# Altium PCB SiLPA_HE.PcbDoc (part 5 of 10)
Units mm, origin at the board's own origin, x right, y up, seen from the top; angles counter-clockwise.
Board outline 222.47 x 100.01 mm, 4 copper layers (Top Layer, Int1 (GND), Int2 (PWR), Bottom Layer), stack 1.508 mm thick; 661 components, 355 nets, 1925 pads, 1744 vias.
Unrouted connection lines stored in the file: 360.
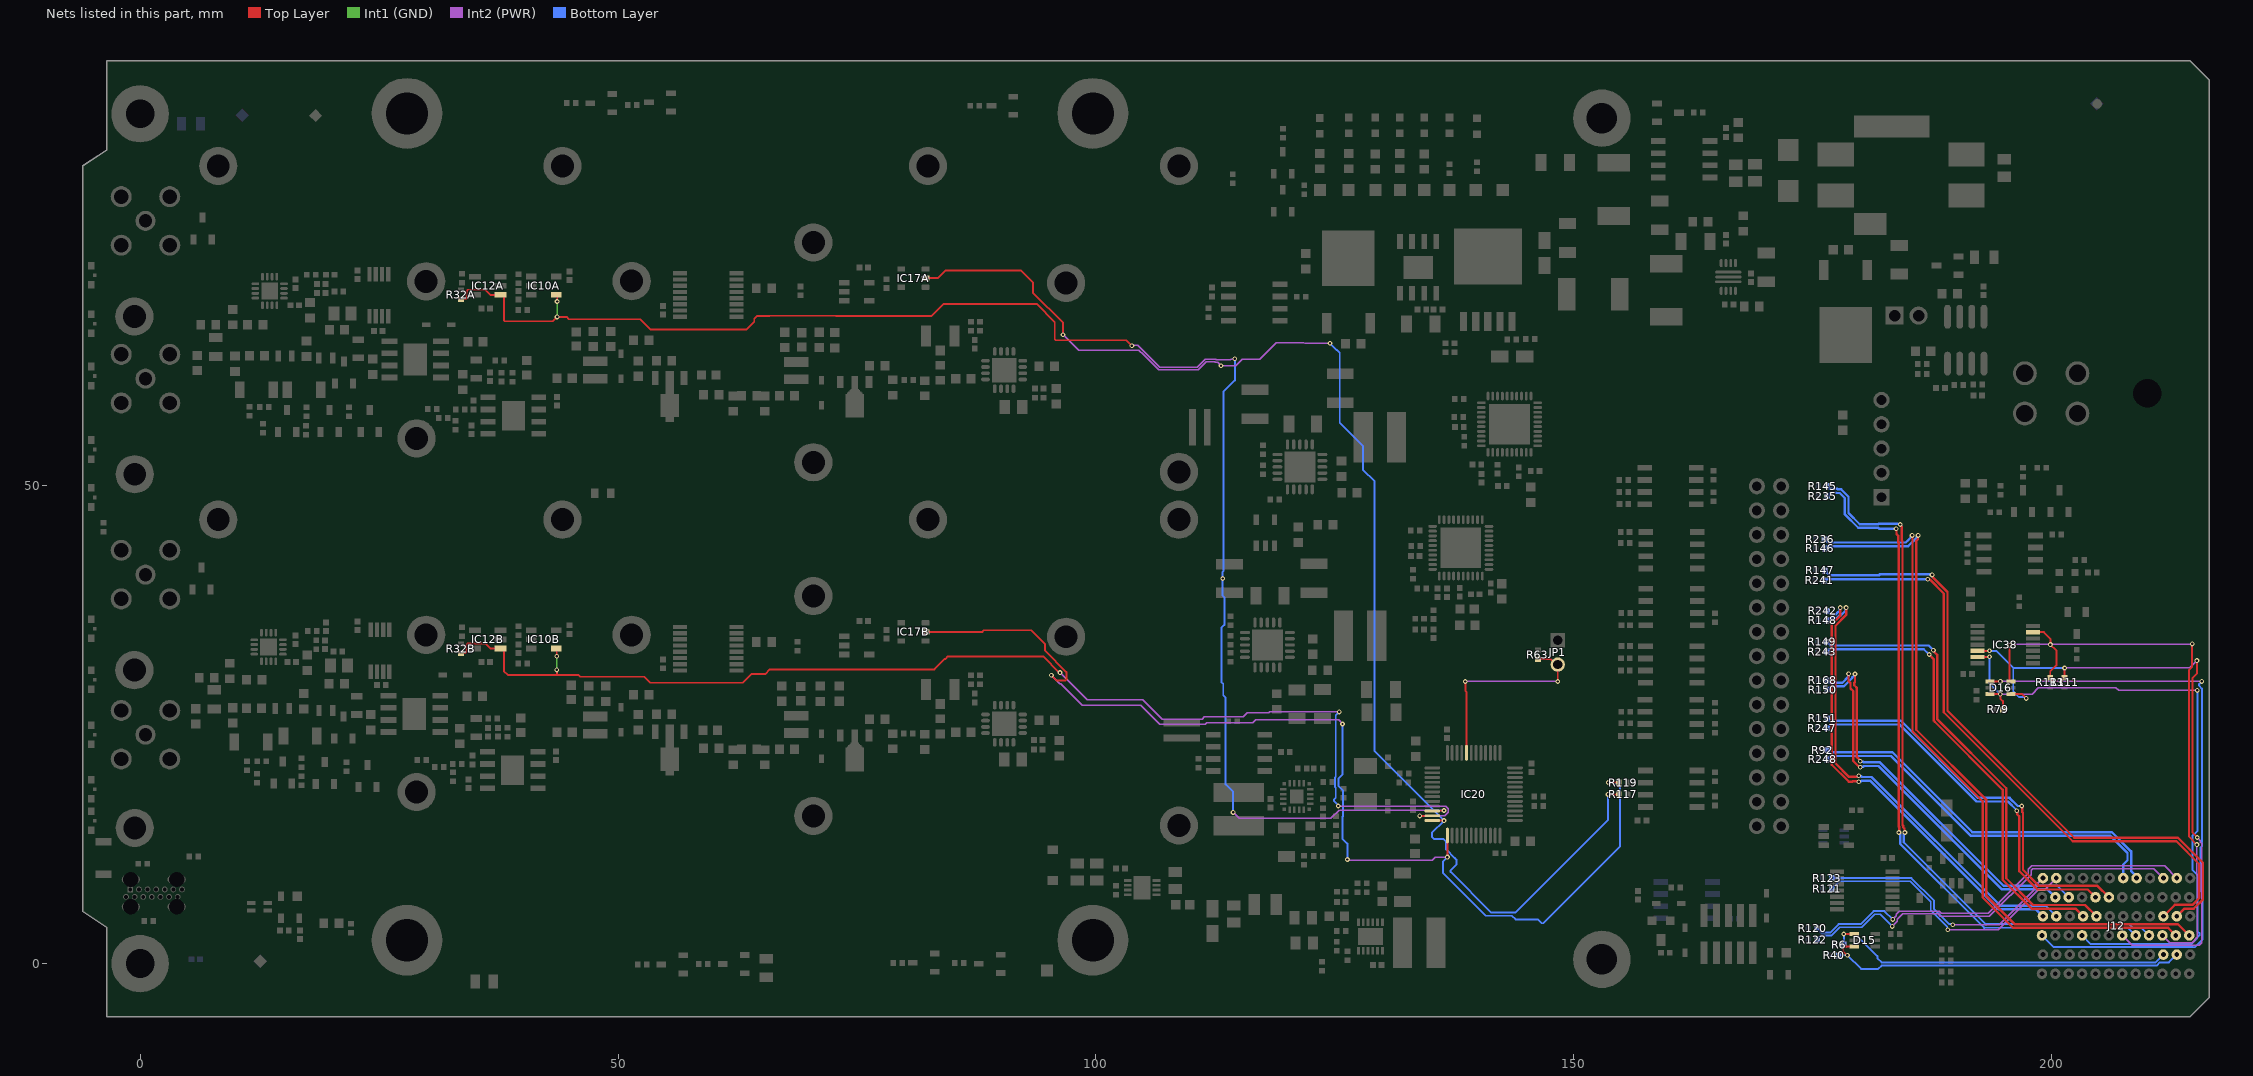
[diagram p5: the nets of this part, all layers, seen from the top]

## Part data (continued)
J3 J4 J5 J6: library part DELOCK_65848, "50 Ohm Through Hole SMA Right Angle PCB Jack", Manufacturer=DELOCK, Manufacturer Part Number="5848 (4043619658480)", Author=GK, Component Type=Standard, ComponentHeight=12.5, CreateDate=13.05.2019, Family=SMA, HelpURL=\\cern.ch\dfs\Applications\Altium\Datasheets\AMPHENOL_132203-16.pdf, LatestRevisionDate=13.05.2019, Mounted=Yes, Part Description="50 Ohm Through Hole SMA Right Angle PCB Jack", Part Number=DELOCK_65848, Pin Count=5, PressFit=No, Sense=No, SMD=No, Socket=No, Status=None
J7: library part MOLEX_39-30-0040, "Connector 4 Male", Manufacturer=MOLEX, Manufacturer Part Number=39-30-0040, Author="CERN DEM JLC", Component Type=Standard, ComponentHeight=11.4mm, CreateDate=2018-10-02, Family="Mini-Fit Jr.™", HelpURL=\\cern.ch\dfs\Applications\Altium\Datasheets\MOLEX_39-30-0040.pdf, LatestRevisionDate=2018-10-02, Mounted=Yes, Part Description="4.20mm (.165\") Pitch Mini-Fit Jr. Header, Dual Row, Right Angle with Snap-in Plastic Peg PCB Lock, 4 Circuits", Part Number=MOLEX_39-30-0040, Pin Count=4, PressFit=No, Sense=No, SMD=No, Socket=No, Status=None
J9: library part 3M_N2530-6002RB, "Connector 30 Male", Manufacturer=3M, Manufacturer Part Number=N2530-6002RB, Author="CERN DEM JLC", Component Type=Standard, ComponentHeight=10.03mm, CreateDate=11.02.2009, Family="Header 30", HelpURL=\\cern.ch\dfs\Applications\Altium\Datasheets\3M_N2530-6002RB.pdf, LatestRevisionDate=11.08.2009, Mounted=Yes, Part Description="30 Contacts - Straight .100'' x .100'' Low Profile Four-Wall Header, 2500 Series", Part Number=3M_N2530-6002RB, Pin Count=30, PressFit=No, Sense=No, SMD=No, Socket=No, Status=None
J10: library part "CON_2x10 1.27 SMT_male_HARWIN", "10 Contacts - Pitch 1.27mm - Dual Row SMT Vertical Pin Header (Post Lead = 3mm, Insulator 1mm)", Manufacturer=HARWIN, Manufacturer Part Number=M50-3600542, Part Number=HARWIN_M50-3600542, Author=GK, Component Type=Standard, ComponentHeight=5.13mm, CreateDate=15.03.2017, Family="Header 10", HelpURL=\\cern.ch\dfs\Applications\Altium\Datasheets\HARWIN_M50-3600842.pdf, LatestRevisionDate=22.05.2017, Mounted=Yes, Part Description="10 Contacts - Pitch 1.27mm - Dual Row SMT Vertical Pin Header (Post Lead = 3mm, Insulator 1mm)", Pin Count=10, PressFit=No, Sense=No, SMD=Yes, Socket=No, Status=None
J11: library part MOLEX_22-04-1021, "Connector 2 Male", Manufacturer=MOLEX, Manufacturer Part Number=22-04-1021, Author="CERN DEM JLC", Component Type=Standard, ComponentHeight=11.7mm, CreateDate=09.02.2012, Family=KK®, HelpURL=\\cern.ch\dfs\Applications\Altium\Datasheets\MOLEX_22-04-1021.pdf, LatestRevisionDate=09.02.2012, Mounted=Yes, Part Description="2.5mm (.100\") Pitch KK® Wire-to-Board Header, Vertical, with Friction Lock, 2 Circuits, Tin (Sn) Plating", Part Number=MOLEX_22-04-1021, Pin Count=2, PressFit=No, Sense=No, SMD=No, Socket=No, Status=None
J12: library part AMPHENOL_10052825-101LF, "72 Contacts Header, 6 Columns, 4 Pairs per Column", Manufacturer=AMPHENOL, Manufacturer Part Number=10052825-101LF, Author="CERN DEM MR", ClassName=Overlapping, Component Type=Standard, ComponentHeight=15.35mm, ComponentLink1Description=Application, ComponentLink1URL=\\cern.ch\dfs\Applications\Altium\Datasheets\AMPHENOL_10052825-101LF_Application.pdf, CreateDate=19/02/2018, Family="AirMax VS", HelpURL=\\cern.ch\dfs\Applications\Altium\Datasheets\AMPHENOL_10052825-101LF.pdf, LatestRevisionDate=19/02/2018, Mounted=Yes, Part Description="72 Contacts, 2mm Pitch, 6 Columns, 4 Pairs per Column, 4 Walls, Right Angle Header", Part Number=AMPHENOL_10052825-101LF, Pin Count=72, PressFit=Yes, Sense=No, SMD=No, Socket=No, Status=None
JP1: library part JUMPER, "Jumper", Supplier Part Number 1=1798942, Supplier 1=Farnell
L1A L1B L2A L2B: library part IND0603_MURATA_BLM18HE102SN1, Case=0603, Manufacturer=MURATA, Manufacturer Part Number=BLM18HE102SN1, Power=600mA, Resistance=0.35R, Tolerance=±25%, Author="CERN DEM JLC", Component Type=Standard, ComponentHeight=0.95mm, CreateDate=09.12.2013, HelpURL=\\cern.ch\dfs\Applications\Altium\Datasheets\IND0603_MURATA_BLM18H.pdf, LatestRevisionDate=25.10.2018, Mounted=Yes, Part Description="SMD EMIFIL Suppression Chip Ferrite Bead", Part Number=IND0603_MURATA_BLM18HE102SN1, Pin Count=2, Sense=No, SMD=Yes, Socket=No, Status=None
L3A L3B L4A L4B: library part IND_1UH_2%_ABRACON_AISC-1008, "Inductor", Case=1008, Manufacturer=ABRACON, Manufacturer Part Number=AISC-1008-1R0G, Power=370mA, Resistance=1.8R, Tolerance=±2%, Author="CERN DEM BC", Component Type=Standard, ComponentHeight=2.29mm, CreateDate=26.08.2019, HelpURL=\\cern.ch\dfs\Applications\Altium\Datasheets\IND_ABRACON_AISC-1008.pdf, LatestRevisionDate=26.08.2019, Mounted=Yes, Part Description="SMD Ceramic Wire-Wound Chip Inductor", Part Number=IND_1UH_2%_ABRACON_AISC-1008, Pin Count=2, Sense=No, SMD=Yes, Socket=No, Status=None
L5A L5B: library part IND0603_TDK_MPZ1608R391A, "Inductor", Case=0603, Manufacturer=TDK, Manufacturer Part Number=MPZ1608R391A, Power=1.2A, Resistance=0.12R, Tolerance=±25%, Author="CERN DEM JLC", Component Type=Standard, ComponentHeight=0.95mm, CreateDate=2009-12-02, HelpURL=\\cern.ch\dfs\Applications\Altium\Datasheets\IND0603_TDK_MPZ1608.pdf, LatestRevisionDate=2009-12-02, Mounted=Yes, Part Description="SMT Chip Bead for Power Line", Part Number=IND0603_TDK_MPZ1608R391A, Pin Count=2, Sense=No, SMD=Yes, Socket=No, Status=None
L8 L9 L10: library part IND_1.5UH_20%_TDK_SPM6530, "Inductor With Core", Manufacturer=TDK, Manufacturer Part Number=SPM6530T-1R5M100, Power=11A, Resistance=0.0097R, Tolerance=±20%, Author="CERN DEM MR", Component Type=Standard, ComponentHeight=3mm, CreateDate=08.11.2016, HelpURL=\\cern.ch\dfs\Applications\Altium\Datasheets\IND_TDK_SPM6530.pdf, LatestRevisionDate=08.11.2016, Mounted=Yes, Part Description="SMD Inductor for Power Circuits (Wound Metal), SPM Series", Part Number=IND_1.5UH_20%_TDK_SPM6530, Pin Count=2, Sense=No, SMD=Yes, Socket=No, Status=None
L11 L21 L22: library part IND_4.7UH_20%_WURTH_WE-SPC_74408943047, "Inductor With Core", Manufacturer="WURTH ELEKTRONIK", Manufacturer Part Number=74408943047, Power=2.2A, Resistance=0.045R, Tolerance=±20%, Author="CERN DEM JLC", Component Type=Standard, ComponentHeight=4.1mm, CreateDate=24.11.2014, HelpURL=\\cern.ch\dfs\Applications\Altium\Datasheets\IND_WURTH_WE-SPC_74408943047.pdf, LatestRevisionDate=05.07.2017, Mounted=Yes, Part Description="SMD Shielded Power Inductor (WE-SPC Series)", Part Number=IND_4.7UH_20%_WURTH_WE-SPC_74408943047, Pin Count=2, Sense=No, SMD=Yes, Socket=No, Status=None
L12A L12B L13A L13B: library part IND0805_TDK_ADL2012S-1R2M-T01, "Inductor", Case=0805, Manufacturer=TDK, Manufacturer Part Number=ADL2012S-1R2M-T01, Power=400mA, Resistance=0.5Ohm, Tolerance=±20%, Author=GK, Component Type=Standard, ComponentHeight=1.45mm, CreateDate=24.03.2020, HelpURL=\\cern.ch\dfs\Applications\Altium\Datasheets\IND0805_TDK_MLZ2012P220WT000.pdf, LatestRevisionDate=24.03.2020, Mounted=Yes, Part Description="SMD Wirewound", Part Number=IND0805_TDK_ADL2012S-1R2M-T01, Pin Count=2, Sense=No, SMD=Yes, Socket=No
L15A L15B: library part IND0603_4.7NH_2%_MURATA_LQW18AN4N7G8Z, "Inductor With Core", Case=0603, Manufacturer=MURATA, Manufacturer Part Number=LQW18AN4N7G8Z, Power=1.5A, Resistance=0R054, Tolerance=±2%, Author="CERN DEM BC", Component Type=Standard, ComponentHeight=1mm, CreateDate=26.08.2019, HelpURL=\\cern.ch\dfs\Applications\Altium\Datasheets\IND_MURATA_LQW18AN4N7G8Z.pdf, LatestRevisionDate=26.08.2019, Mounted=Yes, Part Description="Wirw Wond RF Inductor For Automotive", Part Number=IND0603_4.7NH_2%_MURATA_LQW18AN4N7G8Z, Pin Count=2, Sense=No, SMD=Yes, Socket=No, Status=None
L16A L16B: library part IND0603_6.8NH_2%_MURATA_LQW18AN6N8G8Z, "Inductor With Core", Case=0603, Manufacturer=MURATA, Manufacturer Part Number=LQW18AN6N8G8Z, Power=1.9A, Resistance=0R04, Tolerance=±2%, Author="CERN DEM BC", Component Type=Standard, ComponentHeight=1mm, CreateDate=26.08.2019, HelpURL=\\cern.ch\dfs\Applications\Altium\Datasheets\IND_MURATA_LQW18AN6N8G8Z.pdf, LatestRevisionDate=26.08.2019, Mounted=Yes, Part Description="Wirw Wond RF Inductor For Automotive", Part Number=IND0603_6.8NH_2%_MURATA_LQW18AN6N8G8Z, Pin Count=2, Sense=No, SMD=Yes, Socket=No, Status=None
L17: library part IND1008_1UH_20%_WURTH_74479787210B, "Inductor", Case=1008, Manufacturer="WURTH ELEKTRONIK", Manufacturer Part Number=74479787210B, Power=1.95A, Resistance=0.06R, Tolerance=±20%, Author="CERN DEM JLC", Component Type=Standard, ComponentHeight=1mm, CreateDate=01.10.2014, HelpURL=\\cern.ch\dfs\Applications\Altium\Datasheets\IND_WURTH_WE-PMI_74479787210B.pdf, LatestRevisionDate=01.10.2014, Mounted=Yes, Part Description="Power Multilayer Inductor (WE-PMI Series)", Part Number=IND1008_1UH_20%_WURTH_74479787210B, Pin Count=2, Sense=No, SMD=Yes, Socket=No, Status=None
L18: library part IND0603_MURATA_BLM18SG121TN1D, "Inductor", Case=0603, Manufacturer=MURATA, Manufacturer Part Number=BLM18SG121TN1D, Power=3A, Resistance=0.025R, Tolerance=±25%, Author="CERN DEM JLC", Component Type=Standard, ComponentHeight=0.65mm, CreateDate=23.07.2014, HelpURL=\\cern.ch\dfs\Applications\Altium\Datasheets\IND0603_MURATA_BLM18S.pdf, LatestRevisionDate=23.07.2014, Mounted=Yes, Part Description="SMD EMIFIL Suppression Chip Ferrite Bead", Part Number=IND0603_MURATA_BLM18SG121TN1D, Pin Count=2, Sense=No, SMD=Yes, Socket=No, Status=None
L19: library part IND_MURATA_DLW21SN900SQ2L, "Inductor Common Mode", Case=0805, Manufacturer=MURATA, Manufacturer Part Number=DLW21SN900SQ2L, Power=330mA, Resistance=0.35R, Tolerance=±25%, Author="CERN DEM JLC", Component Type=Standard, ComponentHeight=1.4mm, CreateDate=01.07.2014, HelpURL=\\cern.ch\dfs\Applications\Altium\Datasheets\IND_MURATA_DLW21S.pdf, LatestRevisionDate=01.07.2014, Mounted=Yes, Part Description="Wire Wound Common Mode Choke Coil (DLW21S Series)", Part Number=IND_MURATA_DLW21SN900SQ2L, Pin Count=4, Sense=No, SMD=Yes, Socket=No, Status=None
L20: library part IND_10UH_20%_WURTH_WE-SPC_74408943100, "Inductor With Core", Manufacturer="WURTH ELEKTRONIK", Manufacturer Part Number=74408943100, Power=1.65A, Resistance=0.082R, Tolerance=±20%, Author="CERN DEM MR", Component Type=Standard, ComponentHeight=4.1mm, CreateDate=30.06.2017, HelpURL=\\cern.ch\dfs\Applications\Altium\Datasheets\IND_WURTH_WE-SPC_74408943100.pdf, LatestRevisionDate=05.07.2017, Mounted=Yes, Part Description="SMD Shielded Power Inductor (WE-SPC Series)", Part Number=IND_10UH_20%_WURTH_WE-SPC_74408943100, Pin Count=2, Sense=No, SMD=Yes, Socket=No, Status=None
LD1 LD8 LD10: library part LED_AVAGO_HSMC-C120, "LED Red 1C 2A", Color=Red, Manufacturer="AVAGO TECHNOLOGIES", Manufacturer Part Number=HSMC-C120, Author="CERN DEM JMW", Bonding=No, Component Type=Standard, ComponentHeight=0.7mm, ComponentLink1Description="Design Guide", ComponentLink1URL=\\cern.ch\dfs\Applications\Altium\Datasheets\LED_AVAGO_HSMC-C120_DESIGN-GUIDE.pdf, CreateDate=22.07.2009, HelpURL=\\cern.ch\dfs\Applications\Altium\Datasheets\LED_AVAGO_HSMC-C120.pdf, LatestRevisionDate=20.06.2012, Mounted=Yes, PackageDescription="Red Chip LED, 2-Leads, Body 1.7x1.1mm, Side Emitting Package", Part Description="High Performance Right Angle Chip Red LED", Part Number=LED_AVAGO_HSMC-C120, Pin Count=2, PressFit=No, Sense=No, SMD=Yes, Socket=No
LD2: library part LED_AVAGO_HSME-C120, "LED Green 1C 2A", Manufacturer="AVAGO TECHNOLOGIES", Manufacturer Part Number=HSME-C120, Author="CERN DEM JMW", Bonding=No, Color=Green, Component Type=Standard, ComponentHeight=0.7mm, ComponentLink1Description="Design Guide", ComponentLink1URL=\\cern.ch\dfs\Applications\Altium\Datasheets\LED_AVAGO_HSME-C110_DESIGN-GUIDE.pdf, CreateDate=22.07.2009, HelpURL=\\cern.ch\dfs\Applications\Altium\Datasheets\LED_AVAGO_HSME-C120.pdf, LatestRevisionDate=20.06.2012, Mounted=Yes, PackageDescription="Green Chip LED, 2-Leads, Body 1.7x1.1mm, Side Emitting Package", Part Description="High Performance Right Angle Chip Green LED", Part Number=LED_AVAGO_HSME-C120, Pin Count=2, PressFit=No, Sense=No, SMD=Yes, Socket=No
LD3 LD4 LD5 LD6 LD7 LD9: library part LED_AVAGO_HSME-C120, "LED Green 1C 2A", Color=Green, Manufacturer="AVAGO TECHNOLOGIES", Manufacturer Part Number=HSME-C120, Author="CERN DEM JMW", Bonding=No, Component Type=Standard, ComponentHeight=0.7mm, ComponentLink1Description="Design Guide", ComponentLink1URL=\\cern.ch\dfs\Applications\Altium\Datasheets\LED_AVAGO_HSME-C110_DESIGN-GUIDE.pdf, CreateDate=22.07.2009, HelpURL=\\cern.ch\dfs\Applications\Altium\Datasheets\LED_AVAGO_HSME-C120.pdf, LatestRevisionDate=20.06.2012, Mounted=Yes, PackageDescription="Green Chip LED, 2-Leads, Body 1.7x1.1mm, Side Emitting Package", Part Description="High Performance Right Angle Chip Green LED", Part Number=LED_AVAGO_HSME-C120, Pin Count=2, PressFit=No, Sense=No, SMD=Yes, Socket=No
LD11 LD12 LD13 LD14 LD15 LD16 LD18: library part LED_0603_Green, "Green 0603", Manufacturer=KINGBRIGHT, Manufacturer Part Number=KPH-1608CGCK, Part Number=LED_KINGBRIGHT_KPH-1608CGCK, Author="CERN DEM JLC", Bonding=No, Color=Green, Component Type=Standard, ComponentHeight=0.65mm, CreateDate=03.07.2017, HelpURL=\\cern.ch\dfs\Applications\Altium\Datasheets\LED_KINGBRIGHT_KPH-1608CGCK.pdf, LatestRevisionDate=03.07.2017, Mounted=Yes, PackageDescription="SMT Green LED, Case 0603, Body L 1.6 x W 0.8mm H 0.65mm", Part Description="SMD Green LED, Case 1.6mmX0.8mm(0603), 0.65mm Thickness", Pin Count=2, PressFit=No, Sense=No, SMD=Yes, Socket=No
M1 M4: library part PLATED_HOLE3.0_PAD6.0, "Single Terminal Socket", Author="CERN DEM JLC", Component Type="Standard (No BOM)", ComponentHeight=0mm, CreateDate=26.05.2008, Family="Plated Hole", LatestRevisionDate=26.05.2008, Mounted=No, PackageDescription="Plated Through Hole: Hole Dia.=3.0mm Pad Dia.=6.0mm", Part Description="Plated Through Hole: Hole Dia.=3.0mm Pad Dia.=6.0mm", Part Number=PLATED_HOLE3.0_PAD6.0, Pin Count=1, SMD=No, Socket=No, Status=None, Table=Pads
Q1: library part XTAL_8MHZ_TXC_7A-8.000MAAE-T, "Quartz Crystal", Manufacturer="TXC CORPORATION", Manufacturer Part Number=7A-8.000MAAE-T, Author="CERN DEM JLC", Bonding=No, Component Type=Standard, ComponentHeight=1.2mm, CreateDate=09.10.2014, HelpURL=\\cern.ch\dfs\Applications\Altium\Datasheets\XTAL_TXC_7A.pdf, LatestRevisionDate=12.11.2014, Mounted=Yes, PackageDescription="2 Pins, 3.2x5mm, SMD Glass Seam Sealing Crystal, 7A Serie", Part Description="Tolerance: ±30ppm, Stability: ±30ppm, -20°C to +70°C, 12pF, SMD Glass Seam Sealing Crystal, 7A Series", Part Number=XTAL_8MHZ_TXC_7A-8.000MAAE-T, Pin Count=2, PressFit=No, Sense=No, SMD=Yes, Socket=No
R1A R1B R2A R2B R16 R26 R34 R35 R36 R37 R38 R39 R42 R43 R44 R45 R46 R47 R117 R118 R119: library part R0402_100R_1%_0.0625W_100PPM, "Resistor - 1%", Case=0402, Manufacturer=GENERIC, Manufacturer1 ComponentHeight=0.4mm, Manufacturer1 Example="YAGEO PHYCOMP", Manufacturer1 Part Number=232270671001L, Power=0.0625W, Tolerance=±1%, Author="CERN DEM JLC", Component Type=Standard, CreateDate=03.12.2007, HelpURL=\\cern.ch\dfs\Applications\Altium\Datasheets\R0402_Phycomp_RC0402.pdf, LatestRevisionDate=17.10.2012, Manufacturer Part Number=R0402_100R_1%_0.0625W_100PPM, Mounted=Yes, Part Description="General Purpose Thick Film Chip Resistor", Part Number=R0402_100R_1%_0.0625W_100PPM, Pin Count=2, PressFit=No, Sense=No, SMD=Yes, Socket=No, Status="Not Recommended", TC=±100ppm/°C
R3A R3B R108 R109 R110: library part R0603_1K_1%_0.1W_100PPM, "Resistor - 1%", Case=0603, Manufacturer=GENERIC, Manufacturer1 ComponentHeight=0.55mm, Manufacturer1 Example="NIC COMPONENT", Manufacturer1 Part Number=NRC06F1001TRF, Power=0.1W, Tolerance=±1%, Author="CERN DEM JLC", Component Type=Standard, CreateDate=03.12.2007, HelpURL=\\cern.ch\dfs\Applications\Altium\Datasheets\R0603_NIC_NRC.pdf, LatestRevisionDate=13.03.2008, Manufacturer Part Number=R0603_1K_1%_0.1W_100PPM, Mounted=Yes, Part Description="General Purpose Thick Film Chip Resistor", Part Number=R0603_1K_1%_0.1W_100PPM, Pin Count=2, PressFit=No, Sense=No, SMD=Yes, Socket=No, Status=Preferred, TC=±100ppm/°C
R4A R4B: library part R0603_NO-VALUE, "Resistor", Case=0603, Author="CERN DEM JLC", Component Type=Standard, CreateDate=03.12.2007, HelpURL=Undefined, LatestRevisionDate=13.03.2008, Manufacturer=Undefined, Manufacturer1 ComponentHeight=Undefined, Manufacturer1 Example=Undefined, Manufacturer1 Part Number=Undefined, Manufacturer Part Number=R0603_NO-VALUE, Mounted=No, Part Description="Reserved Footprint For a 0603 (1608) Chip Resistor", Part Number=R0603_NO-VALUE, Pin Count=2, PressFit=No, Sense=No, SMD=Yes, Socket=No, Status=None
R5A R5B: library part R0603_37R4_0.1%_0.063W_10PPM, "Resistor - 0.1%", Case=0603, Manufacturer=GENERIC, Manufacturer1 ComponentHeight=0.5mm, Manufacturer1 Example="TYCO HOLSWORTHY", Manufacturer1 Part Number=RN73C1J37R4BTDF, Power=0.063W, Tolerance=±0.1%, Author="CERN DEM JLC", Component Type=Standard, CreateDate=03.12.2007, HelpURL=\\cern.ch\dfs\Applications\Altium\Datasheets\R0603_Tyco_RN73.pdf, LatestRevisionDate=13.03.2008, Manufacturer Part Number=R0603_37R4_0.1%_0.063W_10PPM, Mounted=Yes, Part Description="Thin Film Chip Resistor", Part Number=R0603_37R4_0.1%_0.063W_10PPM, Pin Count=2, PressFit=No, Sense=No, SMD=Yes, Socket=No, Status="Not Recommended", TC=±10ppm
R6 R18A R18B R24A R24B R40 R41 R48 R49 R50 R85 R86 R87 R88 R92 R96 R97 R98 R99 R101A R101B R102 R103 R104 R105 R114 R120 R121 R122 R123 R127A R127B R128 R145 R146 R147 R148 R149 R150 R151 R159 R160 R161 R165A R165B R168 R174 R176 R180 R181 R197 R235 R236 R241 R242 R243 R247 R248: library part R0402_0R_JUMPER, "Resistor", Case=0402, Manufacturer=GENERIC, Manufacturer1 ComponentHeight=0.4mm, Manufacturer1 Example="YAGEO PHYCOMP", Manufacturer1 Part Number=232270591001L, Author="CERN DEM JLC", Component Type=Standard, CreateDate=03.12.2007, HelpURL=\\cern.ch\dfs\Applications\Altium\Datasheets\R0402_Phycomp_RC0402.pdf, LatestRevisionDate=17.10.2012, Manufacturer Part Number=R0402_0R_JUMPER, Mounted=Yes, Part Description="1A (0.05R Max DC Resistance) Zero Ohm Jumper", Part Number=R0402_0R_JUMPER, Pin Count=2, Sense=No, SMD=Yes, Socket=No
  R6 R18A R18B R24A R24B R40 R41 R48 R49 R50 R85 R86 R87 R88 R92 R96 R97 R98 R99 R101A R101B R103 R105 R114 R120 R121 R122 R123 R127A R127B R145 R146 R147 R148 R149 R150 R151 R159 R160 R161 R165A R165B R168 R174 R176 R180 R181 R197 R235 R236 R241 R242 R243 R247 R248: PressFit=No, Status="Not Recommended"
  R102 R104 R128: Status="Not recommended"
R7A R7B R8A R8B R25A R25B R137 R153 R171 R172: library part R0603_0R_JUMPER, "Resistor", Case=0603, Manufacturer=GENERIC, Manufacturer1 ComponentHeight=0.55mm, Manufacturer1 Example="NIC COMPONENT", Manufacturer1 Part Number=NRC06Z0, Author="CERN DEM JLC", Component Type=Standard, HelpURL=\\cern.ch\dfs\Applications\Altium\Datasheets\R0603_NIC_NRC.pdf, Manufacturer Part Number=R0603_0R_JUMPER, Mounted=Yes, Part Description="1A (0.05R Max DC Resistance) Zero Ohm Jumper", Part Number=R0603_0R_JUMPER, Pin Count=2, PressFit=No, Sense=No, SMD=Yes, Socket=No, Status=Preferred
  R7A R7B R8A R8B R137 R153 R171 R172: CreateDate=03.12.2007, LatestRevisionDate=13.03.2008
  R25A R25B: CreateDate=03/12/2007, LatestRevisionDate=13/03/2008
R9A R9B R10A R10B: library part R0603_150R_1%_0.1W_100PPM, "Resistor - 1%", Case=0603, Manufacturer=GENERIC, Manufacturer1 ComponentHeight=0.55mm, Manufacturer1 Example="NIC COMPONENT", Manufacturer1 Part Number=NRC06F1500TRF, Power=0.1W, Tolerance=±1%, Author="CERN DEM JLC", Component Type=Standard, CreateDate=03.12.2007, HelpURL=\\cern.ch\dfs\Applications\Altium\Datasheets\R0603_NIC_NRC.pdf, LatestRevisionDate=13.03.2008, Manufacturer Part Number=R0603_150R_1%_0.1W_100PPM, Mounted=Yes, Part Description="General Purpose Thick Film Chip Resistor", Part Number=R0603_150R_1%_0.1W_100PPM, Pin Count=2, PressFit=No, Sense=No, SMD=Yes, Socket=No, Status=Preferred, TC=±100ppm/°C
R11 R12 R13 R14 R15 R55 R64 R74 R84 R100: library part R0402_330R_1%_0.0625W_100PPM, "Resistor - 1%", Case=0402, Manufacturer=GENERIC, Manufacturer1 ComponentHeight=0.4mm, Manufacturer1 Example="YAGEO PHYCOMP", Manufacturer1 Part Number=232270673301L, Power=0.0625W, Tolerance=±1%, Author="CERN DEM JLC", Component Type=Standard, CreateDate=03.12.2007, HelpURL=\\cern.ch\dfs\Applications\Altium\Datasheets\R0402_Phycomp_RC0402.pdf, LatestRevisionDate=17.10.2012, Manufacturer Part Number=R0402_330R_1%_0.0625W_100PPM, Mounted=Yes, Part Description="General Purpose Thick Film Chip Resistor", Part Number=R0402_330R_1%_0.0625W_100PPM, Pin Count=2, PressFit=No, Sense=No, SMD=Yes, Socket=No, Status="Not Recommended", TC=±100ppm/°C
R17 R164A R164B: library part R0603_49K9_1%_0.1W_100PPM, "Resistor - 1%", Case=0603, Manufacturer=GENERIC, Manufacturer1 ComponentHeight=0.55mm, Manufacturer1 Example=VISHAY, Manufacturer1 Part Number=CRCW060349R9FKEA, Manufacturer Part Number=R0603_49R9_1%_0.1W_100PPM, Power=0.1W, Tolerance=±1%, Author="CERN DEM JLC", Component Type=Standard, CreateDate=16.11.2017, HelpURL="\\cern.ch\dfs\Applications\Altium\Datasheets\R0603_VISHAY_CRCW e3.pdf", LatestRevisionDate=16.11.2017, Mounted=Yes, Part Description="General Purpose Thick Film Chip Resistor", Part Number=R0603_49K9_1%_0.1W_100PPM, Pin Count=2, PressFit=No, Sense=No, SMD=Yes, Socket=No, Status=Preferred, TC=±100ppm/°C
R19A R19B: library part R0402_39R_1%_0.0625W_100PPM, "Resistor - 1%", Case=0402, Manufacturer=GENERIC, Manufacturer1 ComponentHeight=0.4mm, Manufacturer1 Example="YAGEO PHYCOMP", Manufacturer1 Part Number=232270673909L, Power=0.0625W, Tolerance=±1%, Author="CERN DEM JLC", Component Type=Standard, CreateDate=03.12.2007, HelpURL=\\cern.ch\dfs\Applications\Altium\Datasheets\R0402_Phycomp_RC0402.pdf, LatestRevisionDate=17.10.2012, Manufacturer Part Number=R0402_39R_1%_0.0625W_100PPM, Mounted=Yes, Part Description="General Purpose Thick Film Chip Resistor", Part Number=R0402_39R_1%_0.0625W_100PPM, Pin Count=2, PressFit=No, Sense=No, SMD=Yes, Socket=No, Status="Not Recommended", TC=±100ppm/°C
R20 R61 R62A R62B R63 R66 R70 R71A R71B R72 R93 R107 R131 R132 R142 R143 R144 R152 R156 R157 R182 R183 R218 R274: library part R0402_10K_1%_0.0625W_100PPM, "Resistor - 1%", Case=0402, Manufacturer=GENERIC, Manufacturer1 ComponentHeight=0.4mm, Manufacturer1 Example="YAGEO PHYCOMP", Manufacturer1 Part Number=232270671003L, Power=0.0625W, Tolerance=±1%, Author="CERN DEM JLC", Component Type=Standard, HelpURL=\\cern.ch\dfs\Applications\Altium\Datasheets\R0402_Phycomp_RC0402.pdf, Manufacturer Part Number=R0402_10K_1%_0.0625W_100PPM, Mounted=Yes, Part Description="General Purpose Thick Film Chip Resistor", Part Number=R0402_10K_1%_0.0625W_100PPM, Pin Count=2, SMD=Yes, Socket=No, TC=±100ppm/°C
  R20 R61 R62A R62B R63 R66 R71A R71B R93 R182 R183: CreateDate=2007-12-03, LatestRevisionDate=2012-10-17, Status="Not recommended", Table="Resistors SMD"
  R70 R131 R132 R142 R143 R144 R152 R156 R157 R274: CreateDate=03.12.2007, LatestRevisionDate=17.10.2012, PressFit=No, Sense=No, Status="Not Recommended"
  R72: CreateDate=2007-12-03, LatestRevisionDate=2012-10-17, Sense=No, Status="Not recommended"
  R107 R218: CreateDate=03.12.2007, LatestRevisionDate=17.10.2012, Sense=No, Status="Not recommended"
R21A R21B: library part R0603_750R_1%_0.1W_100PPM, "Resistor - 1%", Case=0603, Manufacturer=GENERIC, Manufacturer1 ComponentHeight=0.55mm, Manufacturer1 Example="NIC COMPONENT", Manufacturer1 Part Number=NRC06F7500TRF, Power=0.1W, Tolerance=±1%, Author="CERN DEM JLC", Component Type=Standard, CreateDate=03.12.2007, HelpURL=\\cern.ch\dfs\Applications\Altium\Datasheets\R0603_NIC_NRC.pdf, LatestRevisionDate=13.03.2008, Manufacturer Part Number=R0603_750R_1%_0.1W_100PPM, Mounted=Yes, Part Description="General Purpose Thick Film Chip Resistor", Part Number=R0603_750R_1%_0.1W_100PPM, Pin Count=2, PressFit=No, Sense=No, SMD=Yes, Socket=No, Status=Preferred, TC=±100ppm/°C
R22 R32A R32B R65 R67 R79 R89 R90 R111 R113 R116 R166A R166B: library part R0402_10k_1%_0.0625W_100PPM, "Resistor - 1%", Case=0402, Manufacturer=GENERIC, Manufacturer1 ComponentHeight=0.4mm, Manufacturer1 Example="YAGEO PHYCOMP", Manufacturer1 Part Number=232270671003L, Manufacturer Part Number=R0402_10K_1%_0.0625W_100PPM, Power=0.0625W, Tolerance=±1%, Author="CERN DEM JLC", Component Type=Standard, CreateDate=03.12.2007, HelpURL=\\cern.ch\dfs\Applications\Altium\Datasheets\R0402_Phycomp_RC0402.pdf, LatestRevisionDate=17.10.2012, Mounted=Yes, Part Description="General Purpose Thick Film Chip Resistor", Part Number=R0402_10K_1%_0.0625W_100PPM, Pin Count=2, PressFit=No, Sense=No, SMD=Yes, Socket=No, Status="Not Recommended", TC=±100ppm/°C
R23A R23B: library part R0402_1K_1%_0.0625W_100PPM, "Resistor - 1%", Case=0402, Manufacturer=GENERIC, Manufacturer1 ComponentHeight=0.4mm, Manufacturer1 Example="YAGEO PHYCOMP", Manufacturer1 Part Number=232270671002L, Power=0.0625W, Tolerance=±1%, Author="CERN DEM JLC", Component Type=Standard, CreateDate=03.12.2007, HelpURL=\\cern.ch\dfs\Applications\Altium\Datasheets\R0402_Phycomp_RC0402.pdf, LatestRevisionDate=17.10.2012, Manufacturer Part Number=R0402_1K_1%_0.0625W_100PPM, Mounted=Yes, Part Description="General Purpose Thick Film Chip Resistor", Part Number=R0402_1K_1%_0.0625W_100PPM, Pin Count=2, PressFit=No, Sense=No, SMD=Yes, Socket=No, Status="Not Recommended", TC=±100ppm/°C
R27A R27B: library part R0603_82R_1%_0.1W_100PPM, "Resistor - 1%", Case=0603, Manufacturer=GENERIC, Manufacturer1 ComponentHeight=0.55mm, Manufacturer1 Example="NIC COMPONENT", Manufacturer1 Part Number=NRC06F82R0TRF, Power=0.1W, Tolerance=±1%, Author="CERN DEM JLC", Component Type=Standard, CreateDate=03.12.2007, HelpURL=\\cern.ch\dfs\Applications\Altium\Datasheets\R0603_NIC_NRC.pdf, LatestRevisionDate=13.03.2008, Manufacturer Part Number=R0603_82R_1%_0.1W_100PPM, Mounted=Yes, Part Description="General Purpose Thick Film Chip Resistor", Part Number=R0603_82R_1%_0.1W_100PPM, Pin Count=2, PressFit=No, Sense=No, SMD=Yes, Socket=No, Status=Preferred, TC=±100ppm/°C
R28: library part R0603_56K_1%_0.1W_100PPM, "Resistor - 1%", Case=0603, Manufacturer=GENERIC, Manufacturer1 ComponentHeight=0.55mm, Manufacturer1 Example="NIC COMPONENT", Manufacturer1 Part Number=NRC06F5602TRF, Power=0.1W, Tolerance=±1%, Author="CERN DEM JLC", Component Type=Standard, CreateDate=03.12.2007, HelpURL=\\cern.ch\dfs\Applications\Altium\Datasheets\R0603_NIC_NRC.pdf, LatestRevisionDate=13.03.2008, Manufacturer Part Number=R0603_56K_1%_0.1W_100PPM, Mounted=Yes, Part Description="General Purpose Thick Film Chip Resistor", Part Number=R0603_56K_1%_0.1W_100PPM, Pin Count=2, PressFit=No, Sense=No, SMD=Yes, Socket=No, Status=Preferred, TC=±100ppm/°C
R29A R29B: library part R0402_15K_1%_0.0625W_100PPM, "Resistor - 1%", Case=0402, Manufacturer=GENERIC, Manufacturer1 ComponentHeight=0.4mm, Manufacturer1 Example=VISHAY, Manufacturer1 Part Number=CRCW040215K0FKED, Power=0.0625W, Tolerance=±1%, Author="CERN DEM JMW", Component Type=Standard, CreateDate=06.07.2015, HelpURL="\\cern.ch\dfs\Applications\Altium\Datasheets\R0402_VISHAY_CRCW e3.pdf", LatestRevisionDate=06.07.2015, Manufacturer Part Number=R0402_15K_1%_0.0625W_100PPM, Mounted=Yes, Part Description="General Purpose Thick Film Chip Resistor", Part Number=R0402_15K_1%_0.0625W_100PPM, Pin Count=2, PressFit=No, Sense=No, SMD=Yes, Socket=No, Status=None, TC=±100ppm/°C
R30: library part R0603_8k2_1%_0.1W_100PPM, "Resistor - 1%", Case=0603, Manufacturer=GENERIC, Manufacturer1 ComponentHeight=0.55mm, Manufacturer1 Example="NIC COMPONENT", Manufacturer1 Part Number=NRC06F8201TRF, Manufacturer Part Number=R0603_8K2_1%_0.1W_100PPM, Power=0.1W, Tolerance=±1%, Author="CERN DEM JLC", Component Type=Standard, CreateDate=03.12.2007, HelpURL=\\cern.ch\dfs\Applications\Altium\Datasheets\R0603_NIC_NRC.pdf, LatestRevisionDate=13.03.2008, Mounted=Yes, Part Description="General Purpose Thick Film Chip Resistor", Part Number=R0603_8K2_1%_0.1W_100PPM, Pin Count=2, PressFit=No, Sense=No, SMD=Yes, Socket=No, Status=Preferred, TC=±100ppm/°C
R31A R31B: library part R0402_3R9_1%_0.0625W_200PPM, "Resistor - 1%", Case=0402, Manufacturer=GENERIC, Manufacturer1 ComponentHeight=0.4mm, Manufacturer1 Example="YAGEO PHYCOMP", Manufacturer1 Part Number=232270673908L, Power=0.0625W, Tolerance=±1%, Author="CERN DEM JLC", Component Type=Standard, CreateDate=03.12.2007, HelpURL=\\cern.ch\dfs\Applications\Altium\Datasheets\R0402_Phycomp_RC0402.pdf, LatestRevisionDate=17.10.2012, Manufacturer Part Number=R0402_3R9_1%_0.0625W_200PPM, Mounted=Yes, Part Description="General Purpose Thick Film Chip Resistor", Part Number=R0402_3R9_1%_0.0625W_200PPM, Pin Count=2, PressFit=No, Sense=No, SMD=Yes, Socket=No, Status="Not Recommended", TC=±200ppm/°C
R33A R33B: library part R0402_20k_1%_0.0625W_100PPM, "Resistor - 1%", Case=0402, Manufacturer=GENERIC, Manufacturer1 ComponentHeight=0.4mm, Manufacturer1 Example="YAGEO PHYCOMP", Manufacturer1 Part Number=232270672003L, Manufacturer Part Number=R0402_20K_1%_0.0625W_100PPM, Power=0.0625W, Tolerance=±1%, Author="CERN DEM JLC", Component Type=Standard, CreateDate=03.12.2007, HelpURL=\\cern.ch\dfs\Applications\Altium\Datasheets\R0402_Phycomp_RC0402.pdf, LatestRevisionDate=17.10.2012, Mounted=Yes, Part Description="General Purpose Thick Film Chip Resistor", Part Number=R0402_20K_1%_0.0625W_100PPM, Pin Count=2, PressFit=No, Sense=No, SMD=Yes, Socket=No, Status="Not Recommended", TC=±100ppm/°C
R51: library part R0603_100K_1%_0.1W_100PPM, "Resistor - 1%", Case=0603, Manufacturer=GENERIC, Manufacturer1 ComponentHeight=0.55mm, Manufacturer1 Example="NIC COMPONENT", Manufacturer1 Part Number=NRC06F1003TRF, Power=0.1W, Tolerance=±1%, Author="CERN DEM JLC", Component Type=Standard, CreateDate=2007-12-03, HelpURL=\\cern.ch\dfs\Applications\Altium\Datasheets\R0603_NIC_NRC.pdf, LatestRevisionDate=2008-03-13, Manufacturer Part Number=R0603_100K_1%_0.1W_100PPM, Mounted=Yes, Part Description="General Purpose Thick Film Chip Resistor", Part Number=R0603_100K_1%_0.1W_100PPM, Pin Count=2, Sense=No, SMD=Yes, Socket=No, Status=Preferred, TC=±100ppm/°C
R52A R52B R60A R60B: library part R0402_82R_1%_0.0625W_100PPM, "Resistor - 1%", Case=0402, Manufacturer=GENERIC, Manufacturer1 ComponentHeight=0.4mm, Manufacturer1 Example="YAGEO PHYCOMP", Manufacturer1 Part Number=232270678209L, Power=0.0625W, Tolerance=±1%, Author="CERN DEM JLC", Component Type=Standard, CreateDate=03.12.2007, HelpURL=\\cern.ch\dfs\Applications\Altium\Datasheets\R0402_Phycomp_RC0402.pdf, LatestRevisionDate=17.10.2012, Manufacturer Part Number=R0402_82R_1%_0.0625W_100PPM, Mounted=Yes, Part Description="General Purpose Thick Film Chip Resistor", Part Number=R0402_82R_1%_0.0625W_100PPM, Pin Count=2, PressFit=No, Sense=No, SMD=Yes, Socket=No, Status="Not Recommended", TC=±100ppm/°C
R53 R54 R133 R138: library part R0402_22R_1%_0.0625W_100PPM, "Resistor - 1%", Case=0402, Manufacturer=GENERIC, Manufacturer1 ComponentHeight=0.4mm, Manufacturer1 Example="YAGEO PHYCOMP", Manufacturer1 Part Number=232270672209L, Power=0.0625W, Tolerance=±1%, Author="CERN DEM JLC", Component Type=Standard, CreateDate=03-Dec-07, HelpURL=\\cern.ch\dfs\Applications\Altium\Datasheets\R0402_Phycomp_RC0402.pdf, LatestRevisionDate=17-Oct-12, Manufacturer Part Number=R0402_22R_1%_0.0625W_100PPM, Mounted=Yes, Part Description="General Purpose Thick Film Chip Resistor", Part Number=R0402_22R_1%_0.0625W_100PPM, Pin Count=2, PressFit=No, Sense=No, SMD=Yes, Socket=No, Status="Not Recommended", TC=±100ppm/°C
R56 R136 R139: library part R0402_100K_1%_0.0625W_100PPM, "Resistor - 1%", Case=0402, Manufacturer=GENERIC, Manufacturer1 ComponentHeight=0.4mm, Manufacturer1 Example="YAGEO PHYCOMP", Manufacturer1 Part Number=232270671004L, Power=0.0625W, Tolerance=±1%, Author="CERN DEM JLC", Component Type=Standard, CreateDate=03.12.2007, HelpURL=\\cern.ch\dfs\Applications\Altium\Datasheets\R0402_Phycomp_RC0402.pdf, LatestRevisionDate=17.10.2012, Manufacturer Part Number=R0402_100K_1%_0.0625W_100PPM, Mounted=Yes, Part Description="General Purpose Thick Film Chip Resistor", Part Number=R0402_100K_1%_0.0625W_100PPM, Pin Count=2, PressFit=No, Sense=No, SMD=Yes, Socket=No, Status="Not Recommended", TC=±100ppm/°C
R57 R129: library part R0402_33K_1%_0.0625W_100PPM, "Resistor - 1%", Case=0402, Manufacturer=GENERIC, Manufacturer1 ComponentHeight=0.4mm, Manufacturer1 Example="YAGEO PHYCOMP", Manufacturer1 Part Number=232270673303L, Power=0.0625W, Tolerance=±1%, Author="CERN DEM JLC", Component Type=Standard, CreateDate=03.12.2007, HelpURL=\\cern.ch\dfs\Applications\Altium\Datasheets\R0402_Phycomp_RC0402.pdf, LatestRevisionDate=17.10.2012, Manufacturer Part Number=R0402_33K_1%_0.0625W_100PPM, Mounted=Yes, Part Description="General Purpose Thick Film Chip Resistor", Part Number=R0402_33K_1%_0.0625W_100PPM, Pin Count=2, PressFit=No, Sense=No, SMD=Yes, Socket=No, Status="Not Recommended", TC=±100ppm/°C
R58 R125A R125B R126A R126B: library part R0402_22K_1%_0.0625W_100PPM, "Resistor - 1%", Case=0402, Manufacturer=GENERIC, Manufacturer1 ComponentHeight=0.4mm, Manufacturer1 Example="YAGEO PHYCOMP", Manufacturer1 Part Number=232270672203L, Power=0.0625W, Tolerance=±1%, Author="CERN DEM JLC", Component Type=Standard, CreateDate=03.12.2007, HelpURL=\\cern.ch\dfs\Applications\Altium\Datasheets\R0402_Phycomp_RC0402.pdf, LatestRevisionDate=17.10.2012, Manufacturer Part Number=R0402_22K_1%_0.0625W_100PPM, Mounted=Yes, Part Description="General Purpose Thick Film Chip Resistor", Part Number=R0402_22K_1%_0.0625W_100PPM, Pin Count=2, PressFit=No, Sense=No, SMD=Yes, Socket=No, Status="Not Recommended", TC=±100ppm/°C
R59A R59B R81: library part R0402_3K9_1%_0.0625W_100PPM, "Resistor - 1%", Case=0402, Manufacturer=GENERIC, Manufacturer1 ComponentHeight=0.4mm, Manufacturer1 Example="YAGEO PHYCOMP", Manufacturer1 Part Number=232270673902L, Power=0.0625W, Tolerance=±1%, Author="CERN DEM JLC", Component Type=Standard, CreateDate=03.12.2007, HelpURL=\\cern.ch\dfs\Applications\Altium\Datasheets\R0402_Phycomp_RC0402.pdf, LatestRevisionDate=17.10.2012, Manufacturer Part Number=R0402_3K9_1%_0.0625W_100PPM, Mounted=Yes, Part Description="General Purpose Thick Film Chip Resistor", Part Number=R0402_3K9_1%_0.0625W_100PPM, Pin Count=2, PressFit=No, Sense=No, SMD=Yes, Socket=No, Status="Not Recommended", TC=±100ppm/°C
R68: library part R0402_18K_1%_0.0625W_100PPM, "Resistor - 1%", Case=0402, Manufacturer=GENERIC, Manufacturer1 ComponentHeight=0.4mm, Manufacturer1 Example="YAGEO PHYCOMP", Manufacturer1 Part Number=232270671803L, Power=0.0625W, Tolerance=±1%, Author="CERN DEM JLC", Component Type=Standard, CreateDate=03.12.2007, HelpURL=\\cern.ch\dfs\Applications\Altium\Datasheets\R0402_Phycomp_RC0402.pdf, LatestRevisionDate=17.10.2012, Manufacturer Part Number=R0402_18K_1%_0.0625W_100PPM, Mounted=Yes, Part Description="General Purpose Thick Film Chip Resistor", Part Number=R0402_18K_1%_0.0625W_100PPM, Pin Count=2, PressFit=No, Sense=No, SMD=Yes, Socket=No, Status="Not Recommended", TC=±100ppm/°C
R69: library part R0603_24K_1%_0.1W_100PPM, "Resistor - 1%", Case=0603, Manufacturer=GENERIC, Manufacturer1 ComponentHeight=0.55mm, Manufacturer1 Example="NIC COMPONENT", Manufacturer1 Part Number=NRC06F2402TRF, Power=0.1W, Tolerance=±1%, Author="CERN DEM JLC", Component Type=Standard, CreateDate=03.12.2007, HelpURL=\\cern.ch\dfs\Applications\Altium\Datasheets\R0603_NIC_NRC.pdf, LatestRevisionDate=13.03.2008, Manufacturer Part Number=R0603_24K_1%_0.1W_100PPM, Mounted=Yes, Part Description="General Purpose Thick Film Chip Resistor", Part Number=R0603_24K_1%_0.1W_100PPM, Pin Count=2, Sense=No, SMD=Yes, Socket=No, Status=Preferred, TC=±100ppm/°C
R73A R73B: library part R0805_1K54_0.1%_0.1W_10PPM, "Resistor - 0.1%", Case=0805, Manufacturer=GENERIC, Manufacturer1 ComponentHeight=0.6mm, Manufacturer1 Example="TYCO HOLSWORTHY", Manufacturer1 Part Number=RN73C2A1K54BTG, Power=0.1W, Tolerance=±0.1%, Author="CERN DEM JLC", Component Type=Standard, CreateDate=03.12.2007, HelpURL=\\cern.ch\dfs\Applications\Altium\Datasheets\R0805_Tyco_RN73.pdf, LatestRevisionDate=13.03.2008, Manufacturer Part Number=R0805_1K54_0.1%_0.1W_10PPM, Mounted=Yes, Part Description="Thin Film Chip Resistor", Part Number=R0805_1K54_0.1%_0.1W_10PPM, Pin Count=2, PressFit=No, Sense=No, SMD=Yes, Socket=No, Status="Not Recommended", TC=±10ppm
R75 R76 R77 R78: library part R0402_2K2_1%_0.0625W_100PPM, "Resistor - 1%", Case=0402, Manufacturer=GENERIC, Manufacturer1 ComponentHeight=0.4mm, Manufacturer1 Example="YAGEO PHYCOMP", Manufacturer1 Part Number=232270672202L, Power=0.0625W, Tolerance=±1%, Author="CERN DEM JLC", Component Type=Standard, CreateDate=03.12.2007, HelpURL=\\cern.ch\dfs\Applications\Altium\Datasheets\R0402_Phycomp_RC0402.pdf, LatestRevisionDate=17.10.2012, Manufacturer Part Number=R0402_2K2_1%_0.0625W_100PPM, Mounted=Yes, Part Description="General Purpose Thick Film Chip Resistor", Part Number=R0402_2K2_1%_0.0625W_100PPM, Pin Count=2, Sense=No, SMD=Yes, Socket=No, Status="Not recommended", TC=±100ppm/°C
R80: library part R0402_24K_1%_0.0625W_100PPM, "Resistor - 1%", Case=0402, Manufacturer=GENERIC, Manufacturer1 ComponentHeight=0.4mm, Manufacturer1 Example="YAGEO PHYCOMP", Manufacturer1 Part Number=232270672403L, Power=0.0625W, Tolerance=±1%, Author="CERN DEM JLC", Component Type=Standard, CreateDate=03.12.2007, HelpURL=\\cern.ch\dfs\Applications\Altium\Datasheets\R0402_Phycomp_RC0402.pdf, LatestRevisionDate=17.10.2012, Manufacturer Part Number=R0402_24K_1%_0.0625W_100PPM, Mounted=Yes, Part Description="General Purpose Thick Film Chip Resistor", Part Number=R0402_24K_1%_0.0625W_100PPM, Pin Count=2, PressFit=No, Sense=No, SMD=Yes, Socket=No, Status="Not Recommended", TC=±100ppm/°C
R82: library part R0402_27K_1%_0.0625W_100PPM, "Resistor - 1%", Case=0402, Manufacturer=GENERIC, Manufacturer1 ComponentHeight=0.4mm, Manufacturer1 Example="YAGEO PHYCOMP", Manufacturer1 Part Number=232270672703L, Power=0.0625W, Tolerance=±1%, Author="CERN DEM JLC", Component Type=Standard, CreateDate=03.12.2007, HelpURL=\\cern.ch\dfs\Applications\Altium\Datasheets\R0402_Phycomp_RC0402.pdf, LatestRevisionDate=17.10.2012, Manufacturer Part Number=R0402_27K_1%_0.0625W_100PPM, Mounted=Yes, Part Description="General Purpose Thick Film Chip Resistor", Part Number=R0402_27K_1%_0.0625W_100PPM, Pin Count=2, PressFit=No, Sense=No, SMD=Yes, Socket=No, Status="Not Recommended", TC=±100ppm/°C
R83: library part R0402_3K_1%_0.0625W_100PPM, "Resistor - 1%", Case=0402, Manufacturer=GENERIC, Manufacturer1 ComponentHeight=0.4mm, Manufacturer1 Example="YAGEO PHYCOMP", Manufacturer1 Part Number=232270673002L, Power=0.0625W, Tolerance=±1%, Author="CERN DEM JLC", Component Type=Standard, CreateDate=03.12.2007, HelpURL=\\cern.ch\dfs\Applications\Altium\Datasheets\R0402_Phycomp_RC0402.pdf, LatestRevisionDate=17.10.2012, Manufacturer Part Number=R0402_3K_1%_0.0625W_100PPM, Mounted=Yes, Part Description="General Purpose Thick Film Chip Resistor", Part Number=R0402_3K_1%_0.0625W_100PPM, Pin Count=2, PressFit=No, Sense=No, SMD=Yes, Socket=No, Status="Not Recommended", TC=±100ppm/°C
R91: library part R0805_4R7_1%_0.125W_200PPM, "Resistor - 1%", Case=0805, Manufacturer=GENERIC, Manufacturer1 ComponentHeight=0.65mm, Manufacturer1 Example="YAGEO PHYCOMP", Manufacturer1 Part Number="232273464708L or RC0805FR-074R7L", Power=0.125W, Tolerance=±1%, Author="CERN DEM JLC", Component Type=Standard, CreateDate=03.12.2007, HelpURL=\\cern.ch\dfs\Applications\Altium\Datasheets\R0805_Phycomp_RC0805.pdf, LatestRevisionDate=17.10.2012, Manufacturer Part Number=R0805_4R7_1%_0.125W_200PPM, Mounted=Yes, Part Description="General Purpose Thick Film Chip Resistor", Part Number=R0805_4R7_1%_0.125W_200PPM, Pin Count=2, PressFit=No, Sense=No, SMD=Yes, Socket=No, Status=Preferred, TC=±200ppm/°C
R94 R95: library part R0402_5K1_1%_0.0625W_100PPM, "Resistor - 1%", Case=0402, Manufacturer=GENERIC, Manufacturer1 ComponentHeight=0.4mm, Manufacturer1 Example="YAGEO PHYCOMP", Manufacturer1 Part Number=232270675102L, Power=0.0625W, Tolerance=±1%, Author="CERN DEM JLC", Component Type=Standard, CreateDate=03.12.2007, HelpURL=\\cern.ch\dfs\Applications\Altium\Datasheets\R0402_Phycomp_RC0402.pdf, LatestRevisionDate=17.10.2012, Manufacturer Part Number=R0402_5K1_1%_0.0625W_100PPM, Mounted=Yes, Part Description="General Purpose Thick Film Chip Resistor", Part Number=R0402_5K1_1%_0.0625W_100PPM, Pin Count=2, PressFit=No, Sense=No, SMD=Yes, Socket=No, Status="Not Recommended", TC=±100ppm/°C
R106 R216: library part R0603_3k3_1%_0.1W_100PPM, "Resistor - 1%", Case=0603, Manufacturer=GENERIC, Manufacturer1 ComponentHeight=0.55mm, Manufacturer1 Example="NIC COMPONENT", Manufacturer1 Part Number=NRC06F3301TRF, Manufacturer Part Number=R0603_3K3_1%_0.1W_100PPM, Power=0.1W, Tolerance=±1%, Author="CERN DEM JLC", Component Type=Standard, CreateDate=03.12.2007, HelpURL=\\cern.ch\dfs\Applications\Altium\Datasheets\R0603_NIC_NRC.pdf, LatestRevisionDate=13.03.2008, Mounted=Yes, Part Description="General Purpose Thick Film Chip Resistor", Part Number=R0603_3K3_1%_0.1W_100PPM, Pin Count=2, PressFit=No, Sense=No, SMD=Yes, Socket=No, Status=Preferred, TC=±100ppm/°C
R112 R115: library part R0603_2K7_1%_0.1W_100PPM, "Resistor - 1%", Case=0603, Manufacturer=GENERIC, Manufacturer1 ComponentHeight=0.55mm, Manufacturer1 Example="YAGEO PHYCOMP", Manufacturer1 Part Number=RC0603FR-072K7L, Power=0.1W, Tolerance=±1%, Author="CERN DEM JLC", Component Type=Standard, CreateDate=2011-05-02, HelpURL=\\cern.ch\dfs\Applications\Altium\Datasheets\R0603_PHYCOMP_RC0603.pdf, LatestRevisionDate=2011-05-02, Manufacturer Part Number=R0603_2K7_1%_0.1W_100PPM, Mounted=Yes, Part Description="General Purpose Thick Film Chip Resistor", Part Number=R0603_2K7_1%_0.1W_100PPM, Pin Count=2, PressFit=No, Sense=No, SMD=Yes, Socket=No, Status=Preferred, TC=±100ppm/°C
R124A R124B: library part R0402_2K4_1%_0.0625W_100PPM, "Resistor - 1%", Case=0402, Manufacturer=GENERIC, Manufacturer1 ComponentHeight=0.4mm, Manufacturer1 Example="YAGEO PHYCOMP", Manufacturer1 Part Number=232270672402L, Power=0.0625W, Tolerance=±1%, Author="CERN DEM JLC", Component Type=Standard, CreateDate=03.12.2007, HelpURL=\\cern.ch\dfs\Applications\Altium\Datasheets\R0402_Phycomp_RC0402.pdf, LatestRevisionDate=17.10.2012, Manufacturer Part Number=R0402_2K4_1%_0.0625W_100PPM, Mounted=Yes, Part Description="General Purpose Thick Film Chip Resistor", Part Number=R0402_2K4_1%_0.0625W_100PPM, Pin Count=2, PressFit=No, Sense=No, SMD=Yes, Socket=No, Status="Not Recommended", TC=±100ppm/°C
R130: library part R0402_NO-VALUE, "Resistor", Case=0402, Author="CERN DEM JLC", Component Type=Standard, CreateDate=03.12.2007, HelpURL=Undefined, LatestRevisionDate=13.03.2008, Manufacturer=Undefined, Manufacturer1 ComponentHeight=Undefined, Manufacturer1 Example=Undefined, Manufacturer1 Part Number=Undefined, Manufacturer Part Number=R0402_NO-VALUE, Mounted=No, Part Description="Reserved Footprint For a 0402 (1005) Chip Resistor", Part Number=R0402_NO-VALUE, Pin Count=2, PressFit=No, Sense=No, SMD=Yes, Socket=No, Status=None
R134: library part R0402_56K_1%_0.0625W_100PPM, "Resistor - 1%", Case=0402, Manufacturer=GENERIC, Manufacturer1 ComponentHeight=0.4mm, Manufacturer1 Example="YAGEO PHYCOMP", Manufacturer1 Part Number=232270675603L, Power=0.0625W, Tolerance=±1%, Author="CERN DEM JLC", Component Type=Standard, CreateDate=03.12.2007, HelpURL=\\cern.ch\dfs\Applications\Altium\Datasheets\R0402_Phycomp_RC0402.pdf, LatestRevisionDate=17.10.2012, Manufacturer Part Number=R0402_56K_1%_0.0625W_100PPM, Mounted=Yes, Part Description="General Purpose Thick Film Chip Resistor", Part Number=R0402_56K_1%_0.0625W_100PPM, Pin Count=2, PressFit=No, Sense=No, SMD=Yes, Socket=No, Status="Not Recommended", TC=±100ppm/°C
R135: library part R0402_240K_1%_0.0625W_100PPM, "Resistor - 1%", Case=0402, Manufacturer=GENERIC, Manufacturer1 ComponentHeight=0.4mm, Manufacturer1 Example="YAGEO PHYCOMP", Manufacturer1 Part Number=232270672404L, Power=0.0625W, Tolerance=±1%, Author="CERN DEM JLC", Component Type=Standard, CreateDate=03.12.2007, HelpURL=\\cern.ch\dfs\Applications\Altium\Datasheets\R0402_Phycomp_RC0402.pdf, LatestRevisionDate=17.10.2012, Manufacturer Part Number=R0402_240K_1%_0.0625W_100PPM, Mounted=Yes, Part Description="General Purpose Thick Film Chip Resistor", Part Number=R0402_240K_1%_0.0625W_100PPM, Pin Count=2, PressFit=No, Sense=No, SMD=Yes, Socket=No, Status="Not Recommended", TC=±100ppm/°C
R140 R154: library part R0402_160K_1%_0.0625W_100PPM, "Resistor - 1%", Case=0402, Manufacturer=GENERIC, Manufacturer1 ComponentHeight=0.4mm, Manufacturer1 Example="YAGEO PHYCOMP", Manufacturer1 Part Number=232270671604L, Power=0.0625W, Tolerance=±1%, Author="CERN DEM JLC", Component Type=Standard, CreateDate=03.12.2007, HelpURL=\\cern.ch\dfs\Applications\Altium\Datasheets\R0402_Phycomp_RC0402.pdf, LatestRevisionDate=17.10.2012, Manufacturer Part Number=R0402_160K_1%_0.0625W_100PPM, Mounted=Yes, Part Description="General Purpose Thick Film Chip Resistor", Part Number=R0402_160K_1%_0.0625W_100PPM, Pin Count=2, PressFit=No, Sense=No, SMD=Yes, Socket=No, Status="Not Recommended", TC=±100ppm/°C
R141A R141B: library part R0402_2K_1%_0.0625W_100PPM, "Resistor - 1%", Case=0402, Manufacturer=GENERIC, Manufacturer1 ComponentHeight=0.4mm, Manufacturer1 Example="YAGEO PHYCOMP", Manufacturer1 Part Number=232270672002L, Power=0.0625W, Tolerance=±1%, Author="CERN DEM JLC", Component Type=Standard, CreateDate=03.12.2007, HelpURL=\\cern.ch\dfs\Applications\Altium\Datasheets\R0402_Phycomp_RC0402.pdf, LatestRevisionDate=17.10.2012, Manufacturer Part Number=R0402_2K_1%_0.0625W_100PPM, Mounted=Yes, Part Description="General Purpose Thick Film Chip Resistor", Part Number=R0402_2K_1%_0.0625W_100PPM, Pin Count=2, PressFit=No, Sense=No, SMD=Yes, Socket=No, Status="Not Recommended", TC=±100ppm/°C
R155 R158: library part R1206_0R_JUMPER, "Resistor", Case=1206, Manufacturer=GENERIC, Manufacturer1 ComponentHeight=0.65mm, Manufacturer1 Example="NIC COMPONENT", Manufacturer1 Part Number=NRC12Z0, Author="CERN DEM JLC", Component Type=Standard, CreateDate=03.12.2007, HelpURL=\\cern.ch\dfs\Applications\Altium\Datasheets\R1206_NIC_NRC.pdf, LatestRevisionDate=13.03.2008, Manufacturer Part Number=R1206_0R_JUMPER, Mounted=Yes, Part Description="2A (0.05R Max DC Resistance) Zero Ohm Jumper", Part Number=R1206_0R_JUMPER, Pin Count=2, PressFit=No, Sense=No, SMD=Yes, Socket=No, Status=Preferred
R173 R179: library part R0612_0R01_1%_1W_100PPM_BOURNS_CFG0612, "Resistor - 1%", Case=0612, Manufacturer=BOURNS, Manufacturer Part Number=CFG0612-FX-R010, Power=1W, Tolerance=±1%, Author="CERN DEM BC", Component Type=Standard, ComponentHeight=0.9mm, CreateDate=17.12.2019, HelpURL=\\cern.ch\dfs\Applications\Altium\Datasheets\R0612_BOURNS_CFG0612.pdf, LatestRevisionDate=17.12.2019, Mounted=Yes, Part Description="Metal Foil, Wide Terminal Current Sense Resistor (CFG Serie)", Part Number=R0612_0R01_1%_1W_100PPM_BOURNS_CFG0612, Pin Count=2, PressFit=No, Sense=No, SMD=Yes, Socket=No, Status="Not Recommended", TC=±100ppm/°C
R175: library part R0805_1M1_1%_0.125W_100PPM, "Resistor - 1%", Case=0805, Manufacturer=GENERIC, Manufacturer1 ComponentHeight=0.6mm, Manufacturer1 Example="NIC COMPONENT", Manufacturer1 Part Number=NRC10F1104TRF, Power=0.125W, Tolerance=±1%, Author="CERN DEM JLC", Component Type=Standard, CreateDate=03/12/2007, HelpURL=\\cern.ch\dfs\Applications\Altium\Datasheets\R0805_NIC_NRC.pdf, LatestRevisionDate=13/03/2008, Manufacturer Part Number=R0805_1M1_1%_0.125W_100PPM, Mounted=Yes, Part Description="General Purpose Thick Film Chip Resistor", Part Number=R0805_1M1_1%_0.125W_100PPM, Pin Count=2, PressFit=No, Sense=No, SMD=Yes, Socket=No, Status=Preferred, TC=±100ppm/°C
R177 R178: library part "R0805_10M_1%_0.125W_100PPM_VISHAY_CRCW e3", "Resistor - 1%", Case=0805, Manufacturer="VISHAY DALE", Manufacturer Part Number=CRCW080510M0FKEA, Power=0.125W, Tolerance=±1%, Author="CERN DEM BC", Component Type=Standard, ComponentHeight=0.5mm, CreateDate=2019-11-12, HelpURL="\\cern.ch\dfs\Applications\Altium\Datasheets\R0805_VISHAY_CRCW e3.pdf", LatestRevisionDate=2019-11-12, Mounted=Yes, Part Description="150V, Standard Thick Film Chip Resistor", Part Number="R0805_10M_1%_0.125W_100PPM_VISHAY_CRCW e3", Pin Count=2, PressFit=No, Sense=No, SMD=Yes, Socket=No, Status=None, TC=±100ppm/°C
RT1: library part THERM_NTC_100K_VISHAY_NTCS0603E3104FXT, "Thermistor NTC (Negative Temperature Coefficient)", Case=0603, Manufacturer=VISHAY, Manufacturer Part Number=NTCS0603E3104FXT, Power=125mW, Tolerance=±1%, Author="CERN DEM JMW", Component Type=Standard, ComponentHeight=0.95mm, CreateDate=26.11.2019, HelpURL=\\cern.ch\dfs\Applications\Altium\Datasheets\THERM_VISHAY_NTCS0603E3.pdf, LatestRevisionDate=26.11.2019, Mounted=Yes, Part Description="SMD 0603, Glass Protected NTC Thermistor", Part Number=THERM_NTC_100K_VISHAY_NTCS0603E3104FXT, Pin Count=2, Sense=No, SMD=Yes, Socket=No, Status=None
S1 S2 S3 S4: library part "WA-SMSI,  9774140360", "WA-SMSI SMD Steel Spacer with internal Thread", Manufacturer="Wurth Elektronik", ComponentLink1Description=Manufacturer, ComponentLink1URL=http://www.we-online.de, ComponentLink2Description=Datasheet, ComponentLink2URL=http://katalog.we-online.de/em/datasheet/9774140360.pdf, Created by="Baojun Chen", Created Date=20.Oct.2015, partNo=9774140360